# Altium PCB ElvipPCB.PcbDoc (part 3 of 3)
Units mm, origin at the board's own origin, x right, y up, seen from the top; angles counter-clockwise.
Board outline 279.53 x 216.03 mm, 2 copper layers (Top Layer, Bottom Layer), stack 2.071 mm thick; 97 components, 303 nets, 932 pads, 720 vias.
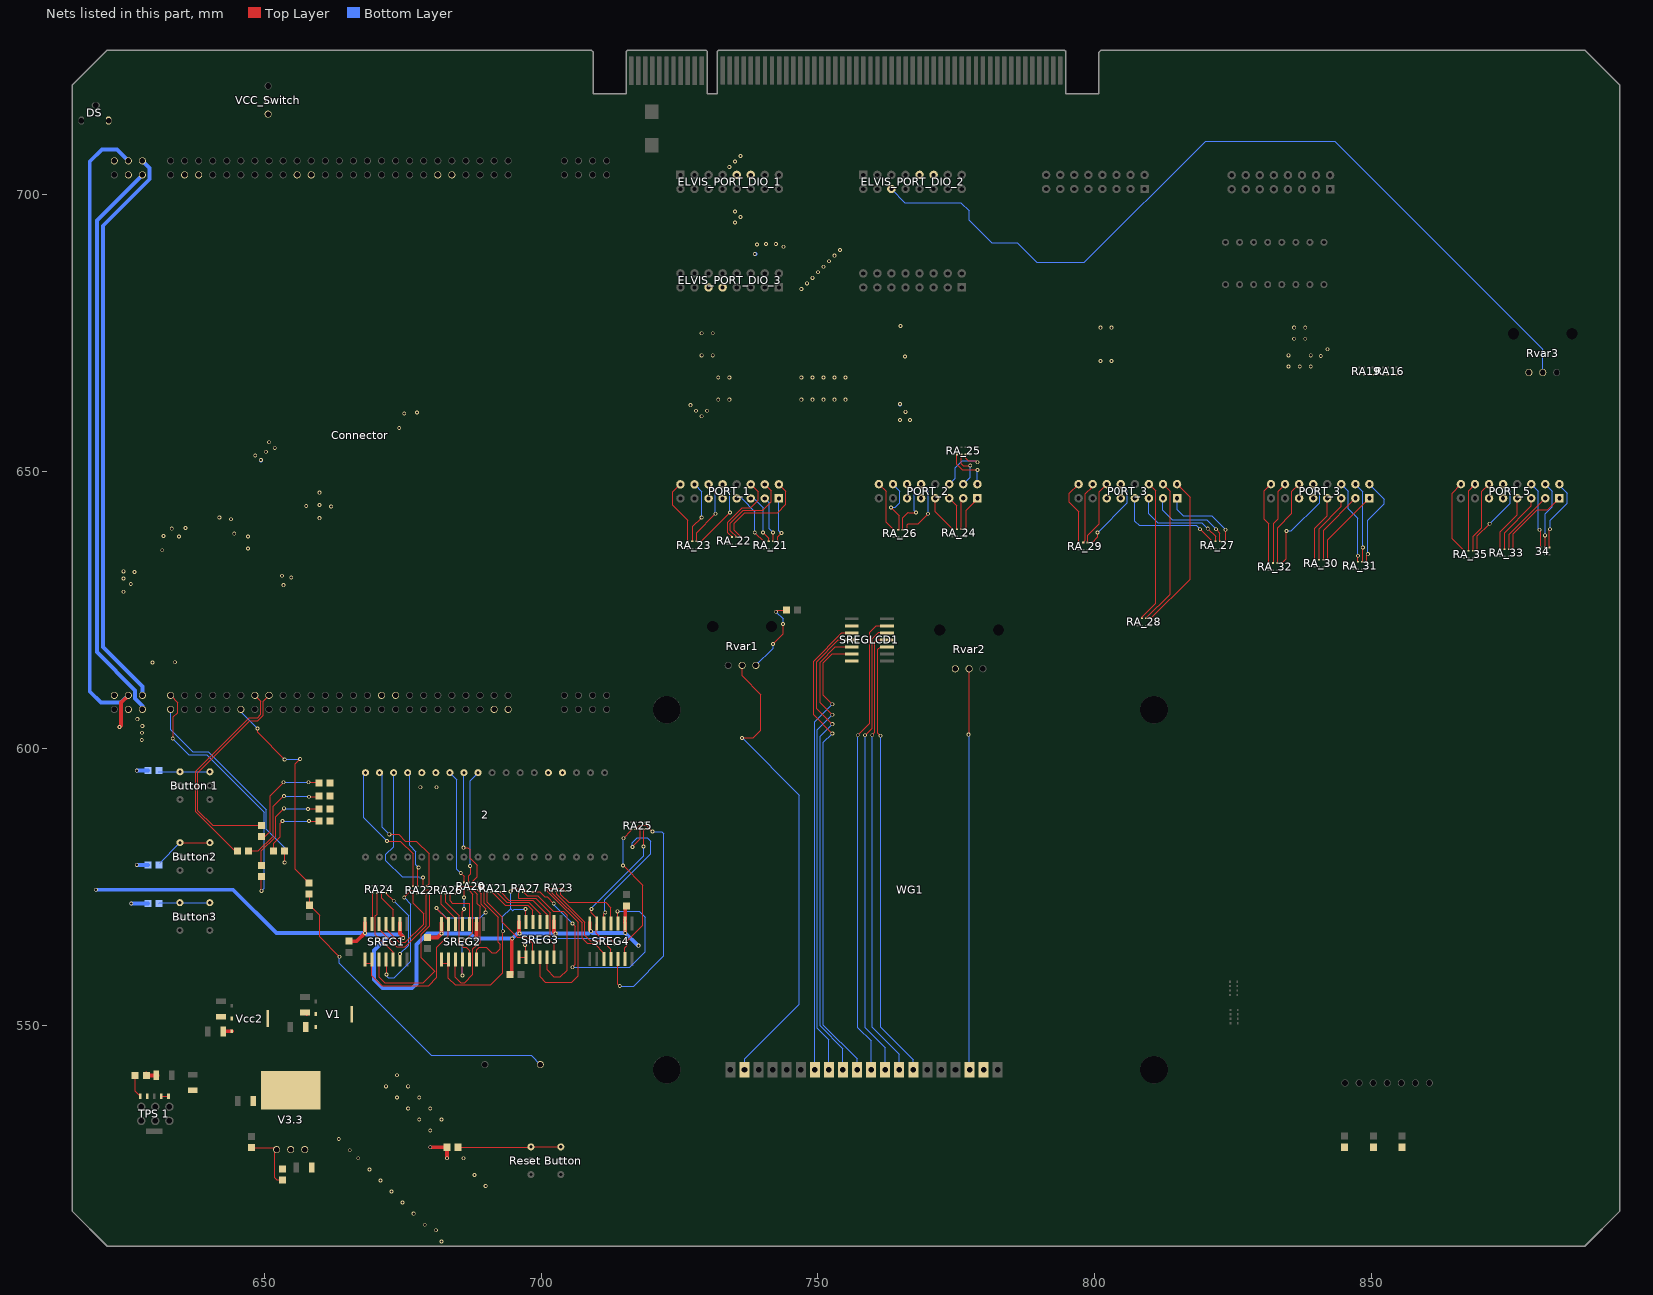
[diagram p3: the nets of this part, all layers, seen from the top]

## Via types
v1: diameter 0.7, hole 0.4, Top Layer to Bottom Layer, 720 vias

## Nets (pads, with @x,y where several pads share a name; then routed paths per layer and width w, separated by ;. In a path a pad name is that pad's centre, name@x,y a point inside that pad or via, vN(x,y) a via of type N, cw(c..) or ccw(c..) an arc to the next point about the centre after c; other vN are vias at no path point) (continued)
Net2_28: 2.28 RA20.1 | length 20.5
  Top Layer w0.2: RA20.1@686.9,575.8 686.9,577 687.3,577.4 687.3,578.7 v1(687.2,578.8)
  Bottom Layer w0.2: v1@687.2,578.9 687.2,594.22 2.28@688.62,595.64
Net2_29: 2.29 RA20.2 | length 21.7
  Top Layer w0.2: v1(686,582.1) 686.8,582.1 687.2,581.7 687.2,580.2 688.5,578.9 688.5,576.8 687.7,576 RA20.2@687.7,575.8
  Bottom Layer w0.2: v1(686,582.1) 686,595.56 2.29@686.08,595.64
Net2_30: 2.30 RA20.0 | length 20.9
  Top Layer w0.2: v1(685.5,577.5) 686.1,576.9 RA20.0@686.1,575.8
  Bottom Layer w0.2: 2.30@683.54,595.64 684.8,594.38 684.8,578.2 v1(685.5,577.5)
Net2_33: 2.33 RA22.1 | length 21.4
  Top Layer w0.2: RA22.1@677.7,575.1 677.7,578.3 v1(677.9,578.5)
  Bottom Layer w0.2: 2.33@675.92,595.64 676.3,595.26 676.3,582.5 677.4,581.4 677.4,579 v1(677.9,578.5)
Net2_34: 2.34 RA22.2 | length 26
  Top Layer w0.2: RA22.2@678.5,575.1 678.7,575.3 v1(678.7,576.7)
  Bottom Layer w0.2: 2.34@673.38,595.64 673.38,582.28 672,580.9 672,579.7 674.9,576.8 678,576.8 ; 678.1,576.7 v1(678.7,576.7)
Net2_35: 2.35 RA22.3 | length 26.6
  Top Layer w0.2: v1(672.6,584.5) 674.3,584.5 675.5,583.3 677.5,583.3 679.8,581 679.8,575.6 RA22.3@679.3,575.1
  Bottom Layer w0.2: 2.35@670.84,595.64 671.3,595.18 671.3,585.8 v1(672.6,584.5)
Net2_36: 2.36 RA22.0 | length 25.8
  Top Layer w0.2: v1(672.2,583.3) 674.6,583.3 676.9,581 RA22.0@676.9,575.1
  Bottom Layer w0.2: 2.36@668.3,595.64 668,595.34 668,587.5 v1(672.2,583.3)
NET_VD1: Connector.74 VD1.1 | length 37.7
  Top Layer w0.2: VD1.1@645.2,581.6 644.6,581.6 637.6,588.6 637.6,595.9 647.3,605.6 648.8,605.6 649.4,606.2 649.4,608.535 Connector.74@648.335,609.6
NET_VD2: Connector.75 VD2.1 | length 39.6
  Top Layer w0.2: VD2.1@649.5,586.1 640.7,586.1 638,588.8 638,595.6 647.4,605 648.8,605 649.8,606 649.8,608.525 Connector.75@650.875,609.6
NET_VD3: Connector.125 VD3.1 | length 39.9
  Top Layer w0.2: v1(653.7,579.405) VD3.1@653.7,581.5
  Bottom Layer w0.2: Connector.125@633.095,607.06 633.095,603.405 637.1,599.4 639.9,599.4 650.4,588.9 650.4,585.4 653.7,582.1 v1(653.7,579.405)
NET_VD4: Connector.68 VD4.1 | length 47.7
  Top Layer w0.2: Connector.68@633.095,609.6 634.4,608.295 634.4,606.5 633.6,605.7 633.6,601.9 v1(633.5,601.8) ; v1(649.5,574.3) VD4.1@649.5,576.9
  Bottom Layer w0.2: v1(633.5,601.8) 636.4,598.9 639.6,598.9 650,588.5 650,574.8 v1(649.5,574.3)
NetButton2_3: Button2.3 Button2.6 R10.2 | length 10.6
  Top Layer w0.2: Button2.3@634.8,583 Button2.6@640.2,583
  Bottom Layer w0.2: R10.2@631.1,579.3 Button2.3@634.8,583
NetButton3_3: Button3.3 Button3.6 R11.2 | length 9.2
  Bottom Layer w0.2: R11.2@631,572 631.16,572.16 Button3.3@634.78,572.16 Button3.6@640.18,572.16
"NetButton 1_3": "Button 1.3" "Button 1.6" R9.2 | length 9.3
  Bottom Layer w0.2: R9.2@630.9,595.8 634.8,595.8 640.2,595.8
NetC1_2: C1.2 R6.2 Sound1.1 | length 58.6
  Top Layer w0.2: R6.2@658.1,573.7 658.2,573.6 C1.2@658.2,571.7 660,569.9 660,566 v1(663.6,562.4)
  Bottom Layer w0.2: v1(663.6,562.4) 663.6,561.2 680.2,544.6 698.2,544.6 Sound1.1@699.87,542.93
NetR2_1: R2.1 Rvar1.2 | length 13.9
  Top Layer w0.2: v1(741.9,618.9) 743.7,620.7 v1(743.7,622.5) ; v1(742.4,624.7) 742.7,625 R2.1@743.9,625
  Bottom Layer w0.2: Rvar1.2@738.8,615 741.9,618.1 v1(741.9,618.9) ; v1(742.4,624.7) 743.7,623.4 v1(743.7,622.5)
NetR7_1: R7.1 VD1.2 | length 20.1
  Top Layer w0.2: VD1.2@647.2,581.5 648.9,581.5 651.6,584.2 651.6,589.6 653.5,591.5 v1(653.6,591.4) ; v1(658.1,591.3) 659.8,591.3 R7.1@659.9,591.4
  Bottom Layer w0.2: v1(653.6,591.4) 658,591.4 v1(658.1,591.3)
NetR8_1: R8.1 VD2.2 | length 18.2
  Top Layer w0.2: VD2.2@649.5,584.1 650.1,584.1 651.1,585.1 651.1,591.5 v1(653.5,593.9) ; v1(658,593.9) 659.8,593.9 R8.1@659.9,593.8
  Bottom Layer w0.2: v1(653.5,593.9) v1(658,593.9)
NetR12_2: "Reset Button.3" "Reset Button.6" R12.2 | length 18.6
  Top Layer w0.2: R12.2@685,528 698.1,528 698.17,528.07 703.57,528.07
NetR13_2: "TPS 1.4" R13.2 | length 4.1
  Top Layer w0.2: R13.2@626.71,540.96 626.71,538.11 627.62,537.2
NetR14_1: R14.1 VD4.2 | length 18.4
  Top Layer w0.2: VD4.2@649.5,578.9 649.5,581.5 652.1,584.1 652.1,587.7 v1(653.6,589.2) ; v1(657.9,589.1) 657.916,589.116 R14.1@659.912,589.116
  Bottom Layer w0.2: v1(653.6,589.2) 653.7,589.1 v1(657.9,589.1)
NetR15_1: R15.1 VD3.2 | length 12.7
  Top Layer w0.2: VD3.2@651.7,581.5 651.7,582.9 652.9,584.1 652.9,586.5 v1(653.3,586.9) ; v1(658.1,586.9) R15.1@659.9,586.9
  Bottom Layer w0.2: v1(653.3,586.9) v1(658.1,586.9)
NetR50_1: R50.1 R51.2 V3.3.0 | length 11.5
  Top Layer w0.2: R51.2@647.74,527.95 651.88,527.95 V3.3.0@652.25,527.58 651.88,527.21 651.88,522.48 652.27,522.09 R50.1@653.34,522.09
NetRA20_4: RA20.4 SREG1.1 SREG1.2 SREG2.13 | length 45.6
  Top Layer w0.2: SREG1.1@668.2,561.2 669.47,561.2 669.47,558.93 671.2,557.2 679.7,557.2 681.2,558.7 681.2,564.1 683.27,566.17 SREG2.13@683.27,568.3 683.27,569.03 v1(681.1,571.2) ; RA20.4@688.5,574.5 689.2,573.8 689.2,571.9 690,571.1 v1(690,570.4)
  Bottom Layer w0.2: v1(681.1,571.2) 682.9,569.4 689,569.4 v1(690,570.4)
NetRA20_5: RA20.5 SREG2.3 | length 23.2
  Top Layer w0.2: SREG2.3@684.54,561.2 684.54,558.66 685.5,557.7 686.2,557.7 687.7,559.2 687.7,563.8 688.4,564.5 688.6,564.5 689,564.9 689,571.5 688.5,572 688.5,573.7 RA20.5@687.7,574.5
NetRA20_6: RA20.6 SREG2.4 | length 20.6
  Top Layer w0.2: v1(685.8,559) 685.8,562.94 SREG2.4@685.81,562.95 ; v1(686.3,565.3) 687.7,566.7 687.7,573.7 RA20.6@686.9,574.5
  Bottom Layer w0.2: v1(685.8,559) 685.8,564.8 v1(686.3,565.3)
NetRA20_7: RA20.7 SREG2.11 | length 6.6
  Top Layer w0.2: SREG2.11@685.81,568.5 685.81,570.51 686.1,570.8 v1(686.1,571) ; v1(686.1,573.1) RA20.7@686.1,574.5
  Bottom Layer w0.2: 685.9,570.6 686.1,570.8 v1(686.1,571) v1(686.1,573.1)
NetRA21_4: RA21.4 SREG3.10 | length 11.2
  Top Layer w0.2: RA21.4@692.7,574.1 694.2,572.6 698.5,572.6 701.08,570.02 SREG3.10@701.08,568.9
NetRA21_5: RA21.5 SREG3.11 | length 10.8
  Top Layer w0.2: RA21.5@691.9,574.1 693.8,572.2 697.8,572.2 699.81,570.19 SREG3.11@699.81,568.9
NetRA21_6: RA21.6 SREG3.12 | length 10.7
  Top Layer w0.2: RA21.6@691.1,574.1 693.5,571.7 697.6,571.7 698.54,570.76 SREG3.12@698.54,568.9
NetRA21_7: RA21.7 SREG3.3 | length 17
  Top Layer w0.2: RA21.7@690.3,574.1 690.3,572.2 693,569.5 693,568.6 695.7,565.9 697.5,565.9 698.54,564.86 SREG3.3@698.54,562.3 SREG3.3@698.54,561.6
NetRA22_4: RA22.4 SREG1.12 | length 18.4
  Top Layer w0.2: SREG1.12@670.74,568.5 SREG1.12@670.74,568.3 670.74,567.36 673.9,564.2 675.5,564.2 679.3,568 RA22.4@679.3,573.8
NetRA22_5: RA22.5 SREG1.3 | length 31.7
  Top Layer w0.2: SREG1.3@670.74,561.2 670.8,561.14 670.8,558.7 671.8,557.7 678.7,557.7 680.8,559.8 678.4,562.2 678.4,566.5 679.9,568 679.9,574.3 679.7,574.5 679.2,574.5 RA22.5@678.5,573.8
NetRA22_6: RA22.6 SREG1.4 | length 23.3
  Top Layer w0.2: SREG1.4@672.01,561.2 672.1,561.11 v1(672.1,559.2) ; v1(675.3,573.1) 676.6,574.4 677.1,574.4 RA22.6@677.7,573.8
  Bottom Layer w0.2: v1(672.1,559.2) 672.1,558.9 672.4,558.6 673.5,558.6 676.5,561.6 676.5,571.9 v1(675.3,573.1)
NetRA22_7: RA22.7 SREG1.11 | length 16.5
  Top Layer w0.2: SREG1.11@672.01,568.5 SREG1.11@672.01,568.3 672.01,567.39 674.4,565 675.5,565 678.8,568.3 678.8,570.2 676.9,572.1 RA22.7@676.9,573.8
NetRA23_4: RA23.4 SREG3.4 | length 32.1
  Top Layer w0.2: SREG3.4@699.81,561.6 699.81,558.79 700.8,557.8 705.5,557.8 706.7,559 706.7,568.6 701.1,574.2 701.1,574.5 701.4,574.8 703.8,574.8 RA23.4@704.4,574.2
NetRA23_5: RA23.5 SREG4.11 | length 13.3
  Top Layer w0.2: RA23.5@703.6,574.2 703.6,573.6 705,572.2 711.7,572.2 712.61,571.29 SREG4.11@712.61,568.6
NetRA23_6: RA23.6 SREG4.4 | length 18.3
  Top Layer w0.2: RA23.6@702.8,574.2 702.8,573.7 707.9,568.6 707.9,566.3 708.9,565.3 711.1,565.3 712.61,563.79 SREG4.4@712.61,562 SREG4.4@712.61,561.3
NetRA23_7: RA23.7 SREG4.3 | length 17.5
  Top Layer w0.2: RA23.7@702,574.2 702,573.9 707.4,568.5 707.4,565.7 708.3,564.8 709.59,564.8 711.34,563.05 SREG4.3@711.34,562 SREG4.3@711.34,561.3
NetRA24_0: RA24.0 SREG1.6 | length 15.1
  Top Layer w0.2: RA24.0@672,573.9 v1(673.4,572.5) ; SREG1.6@674.55,561.25 SREG1.6@674.55,561.9 SREG1.6@674.55,562.95
  Bottom Layer w0.2: v1(673.4,572.5) 676.1,569.8 676.1,564.5 v1(674.5,562.9)
NetRA24_1: RA24.1 SREG1.10 | length 6.3
  Top Layer w0.2: RA24.1@671.2,573.9 671.2,573 673.28,570.92 SREG1.10@673.28,568.5
NetRA24_2: RA24.2 SREG1.5 | length 14.1
  Top Layer w0.2: RA24.2@670.4,573.9 670.4,570.1 670.1,569.8 670.1,566.4 673.28,563.22 SREG1.5@673.28,561.9 SREG1.5@673.28,561.2
NetRA24_3: RA24.3 SREG1.13 | length 5.5
  Top Layer w0.2: SREG1.13@669.47,568.5 669.6,568.63 RA24.3@669.6,573.9
NetRA25_0: RA25.0 SREG3.1 SREG3.2 SREG4.13 | length 47.5
  Top Layer w0.2: SREG3.1@696,562.3 SREG3.2@697.27,562.3 697.27,564.33 v1(697.1,564.5) ; v1(709.1,571) 709.1,570.3 710.07,569.33 SREG4.13@710.07,568.6 ; SREG4.13@710.07,568.4 710,568.33 710,566.6 710.6,566 712.1,566 v1(713.3,564.8) ; v1(718.5,582.3) 718.5,585.2 RA25.0@718.7,585.4
  Bottom Layer w0.2: v1(697.1,564.5) 698.3,565.7 712.4,565.7 v1(713.3,564.8) ; v1@709.1,571.2 718.5,580.6 v1(718.5,582.3)
NetRA25_1: RA25.1 SREG4.12 | length 26.8
  Top Layer w0.2: SREG4.12@711.34,568.6 711.34,570.14 v1(711.6,570.4) ; v1(716.5,582.2) 716.5,582.3 717.9,583.7 RA25.1@717.9,585.4
  Bottom Layer w0.2: v1(711.6,570.4) 711.5,570.5 711.5,572.7 719.8,581 719.8,583.3 719.2,583.9 717.4,583.9 716.5,583 v1(716.5,582.2)
NetRA25_2: RA25.2 SREG4.5 | length 42.6
  Top Layer w0.2: SREG4.5@713.88,561.3 713.88,557.42 v1(714.2,557.1) ; RA25.2@717.1,585.4 717.8,586.1 719,586.1 v1(720.1,585)
  Bottom Layer w0.2: v1(714.2,557.1) 716.7,557.1 722.2,562.6 722.2,584.6 721.8,585 v1(720.1,585)
NetRA25_3: RA25.3 SREG4.6 | length 27.6
  Top Layer w0.2: v1(714.8,578.9) 718.4,575.3 718.4,568.1 715.6,565.3 715.6,564.45 715.15,564 SREG4.6@715.15,562 SREG4.6@715.15,561.3 ; v1(714.9,583.8) 716.3,585.2 RA25.3@716.3,585.4
  Bottom Layer w0.2: v1(714.8,578.9) 714.8,583.7 v1(714.9,583.8)
NetRA26_0: RA26.0 SREG2.6 | length 25.7
  Top Layer w0.2: RA26.0@684.4,573.8 685.7,575.1 689.3,575.1 689.7,574.7 689.7,572.1 692.3,569.5 692.3,565 692.6,564.7 692.6,563.8 691.9,563.1 691.1,563.1 690.1,564.1 688.8,564.1 688.35,563.65 SREG2.6@688.35,561.9 SREG2.6@688.35,561.2
NetRA26_1: RA26.1 SREG2.10 | length 8.5
  Top Layer w0.2: RA26.1@683.6,573.8 683.6,572.5 684,572.1 687.08,572.1 SREG2.10@687.08,568.5
NetRA26_2: RA26.2 SREG2.5 | length 14.7
  Top Layer w0.2: RA26.2@682.8,573.8 682.8,572.2 685.2,569.8 685.2,564.83 685.93,564.1 686.5,564.1 687.08,563.52 SREG2.5@687.08,561.9 SREG2.5@687.08,561.2
NetRA26_3: RA26.3 SREG2.12 | length 6.4
  Top Layer w0.2: RA26.3@682,573.8 682,571.9 684.54,569.36 SREG2.12@684.54,568.5
NetRA27_0: RA27.0 SREG4.10 | length 46
  Top Layer w0.2: RA27.0@698.4,574.1 699.8,574.1 700.7,573.2 701.1,573.2 v1(702.3,572) ; v1(705.7,560.5) 706.2,561 706.2,567.9 v1(705.7,568.4) ; v1(713.8,570.6) 713.88,570.52 SREG4.10@713.88,568.6
  Bottom Layer w0.2: v1(702.3,572) 702.3,571.8 v1(705.7,568.4) ; v1(705.7,560.5) 716,560.5 718.8,563.3 718.8,569.5 717.7,570.6 v1(713.8,570.6)
NetRA27_1: RA27.1 SREG2.1 SREG2.2 SREG3.13 | length 40.1
  Top Layer w0.2: SREG2.1@682,561.2 683.27,561.2 683.27,558.53 684.5,557.3 690.9,557.3 693.1,559.5 v1(693.1,567) ; v1(694.5,574.2) 695,574.7 697,574.7 RA27.1@697.6,574.1 ; 697.2,570.6 v1(697.2,571) 697.27,570.93 SREG3.13@697.27,568.9
  Bottom Layer w0.2: v1(693.1,567) 693.1,569.7 694.5,571.1 ; v1(694.5,574.2) 694.5,571.1 ; v1@697.1,570.7 697.2,570.6 v1(697.2,571) 695.2,571 694.9,570.7 694.5,571.1
NetRA27_2: RA27.2 SREG3.5 | length 25.7
  Top Layer w0.2: RA27.2@696.8,574.1 697.5,573.4 699.4,573.4 702.2,570.6 704,570.6 704.7,569.9 704.7,560 703.5,558.8 702.3,558.8 701.08,560.02 SREG3.5@701.08,561.6
NetRA27_3: RA27.3 SREG3.6 | length 16.9
  Top Layer w0.2: RA27.3@696,574.1 696,573 699,573 701.7,570.3 701.7,565.3 702.35,564.65 SREG3.6@702.35,562.3 SREG3.6@702.35,561.6
NetRvar1_1: Rvar1.1 WG1.18 | length 85.3
  Top Layer w0.2: v1(736.3,601.9) 738.3,601.9 739.7,603.3 739.7,609.7 736.3,613.1 Rvar1.1@736.3,615
  Bottom Layer w0.2: v1(736.3,601.9) 746.6,591.6 746.6,553.8 736.74,543.94 WG1.18@736.74,542
NetRvar2_1: Rvar2.1 WG1.2 | length 72.5
  Top Layer w0.2: v1(777.2,602.5) 777.3,602.6 Rvar2.1@777.3,614.4
  Bottom Layer w0.2: v1(777.2,602.5) 777.3,602.4 777.3,542.08 WG1.2@777.38,542
NetSREGLCD1_3: SREGLCD1.3 WG1.6 | length 81.2
  Top Layer w0.2: v1(761.3,602.3) 760.8,602.8 760.8,617.9 761.3,618.4 763.14,618.4 SREGLCD1.3@763.2,618.34
  Bottom Layer w0.2: v1(761.3,602.3) 761.3,549.7 767.22,543.78 WG1.6@767.22,542
NetSREGLCD1_4: SREGLCD1.4 WG1.7 | length 82.6
  Top Layer w0.2: v1(759.8,602.4) 760.3,602.9 760.3,619.3 760.61,619.61 SREGLCD1.4@762.5,619.61 SREGLCD1.4@763.2,619.61
  Bottom Layer w0.2: v1(759.8,602.4) 759.8,549.7 764.68,544.82 WG1.7@764.68,542
NetSREGLCD1_5: SREGLCD1.5 WG1.8 | length 83.8
  Top Layer w0.2: v1(758.5,602.4) 759.8,603.7 759.8,619.8 761,621 763.08,621 SREGLCD1.5@763.2,620.88
  Bottom Layer w0.2: v1(758.5,602.4) 758.5,549.6 762.14,545.96 WG1.8@762.14,542
NetSREGLCD1_6: SREGLCD1.6 WG1.9 | length 85.2
  Top Layer w0.2: v1(757.2,602.4) 759.4,604.6 759.4,621 760.55,622.15 SREGLCD1.6@762.5,622.15 SREGLCD1.6@763.2,622.15
  Bottom Layer w0.2: v1(757.2,602.4) 757.2,549.6 759.6,547.2 WG1.9@759.6,542
NetSREGLCD1_10: SREGLCD1.10 WG1.10 | length 86.7
  Top Layer w0.2: v1(752.6,602.7) 749.2,606.1 749.2,615.8 754.28,620.88 SREGLCD1.10@755.4,620.88
  Bottom Layer w0.2: v1(752.6,602.7) 751,601.1 751,550 757.06,543.94 WG1.10@757.06,542
NetSREGLCD1_11: SREGLCD1.11 WG1.11 | length 84.7
  Top Layer w0.2: v1(752.6,604.4) 749.8,607.2 749.8,615.7 753.71,619.61 SREGLCD1.11@755.4,619.61
  Bottom Layer w0.2: v1(752.6,604.4) 750.4,602.2 750.4,549.9 754.52,545.78 WG1.11@754.52,542
NetSREGLCD1_12: SREGLCD1.12 WG1.12 | length 82.6
  Top Layer w0.2: v1(752.6,606.1) 750.4,608.3 750.4,615.6 753.14,618.34 SREGLCD1.12@755.4,618.34
  Bottom Layer w0.2: WG1.12@751.98,542 751.98,547.42 749.9,549.5 749.9,603.4 v1(752.6,606.1)
NetSREGLCD1_13: SREGLCD1.13 WG1.13 | length 80.5
  Top Layer w0.2: v1(752.6,608) 751,609.6 751,615.5 752.57,617.07 SREGLCD1.13@755.4,617.07
  Bottom Layer w0.2: WG1.13@749.44,542 749.44,604.84 v1(752.6,608)
P_GIO_1_0: PORT_1.0 RA_21.3 | length 8.2
  Top Layer w0.2: RA_21.3@742.7,637.4 742.7,638.2 v1(743.4,638.9)
  Bottom Layer w0.2: PORT_1.0@742.95,645.16 742.95,639.35 v1(743.4,638.9)
P_GIO_1_1: PORT_1.1 RA_21.2 | length 8.4
  Top Layer w0.2: RA_21.2@741.9,637.4 v1(741.9,639)
  Bottom Layer w0.2: PORT_1.1@740.41,645.16 741.2,644.37 741.2,639.7 v1(741.9,639)
P_GIO_1_2: PORT_1.2 RA_21.1 | length 9.4
  Top Layer w0.2: v1(740.1,639) 741.1,638 RA_21.1@741.1,637.4
  Bottom Layer w0.2: PORT_1.2@737.87,645.16 738.44,645.16 740.1,643.5 v1(740.1,639)
P_GIO_1_3: PORT_1.3 RA_21.0 | length 10.4
  Top Layer w0.2: v1(738.6,639) 740.2,637.4 RA_21.0@740.3,637.4
  Bottom Layer w0.2: PORT_1.3@735.33,645.16 736.24,645.16 738.6,642.8 v1(738.6,639)
P_GIO_1_8: PORT_1.8 RA_23.4 | length 12
  Top Layer w0.2: PORT_1.8@725.17,647.7 723.8,646.33 723.8,643.9 726.5,641.2 RA_23.4@726.5,637.4
P_GIO_1_9: PORT_1.9 RA_23.5 | length 11.7
  Top Layer w0.2: RA_23.5@727.3,637.4 727.4,637.5 727.4,640.1 v1(729,641.7) ; PORT_1.9@727.71,647.49 PORT_1.9@727.71,647.7
  Bottom Layer w0.2: PORT_1.9@727.71,647.7 729,646.41 v1(729,641.7)
P_GIO_1_10: PORT_1.10 RA_23.6 | length 12.2
  Top Layer w0.2: RA_23.6@728.1,637.4 728.1,639 v1(731.5,642.4)
  Bottom Layer w0.2: PORT_1.10@730.25,647.7 731.5,646.45 v1(731.5,642.4)
P_GIO_1_11: PORT_1.11 RA_23.7 | length 13
  Top Layer w0.2: RA_23.7@728.9,637.4 v1(734.1,642.6)
  Bottom Layer w0.2: PORT_1.11@732.79,647.7 734.1,646.39 v1(734.1,642.6)
P_GIO_1_13_E_VCC: PORT_1.13 RA_22.1 | length 13.6
  Top Layer w0.2: RA_22.1@734.5,638.2 733.7,639 733.7,640.9 736.3,643.5 737.9,643.5 739.2,644.8 739.2,646.37 PORT_1.13@737.87,647.7
P_GIO_1_14_E_SYNC: PORT_1.14 RA_22.2 | length 15.6
  Top Layer w0.2: RA_22.2@735.3,638.2 734.2,639.3 734.2,640.7 736.5,643 740,643 741.6,644.6 741.6,646.51 PORT_1.14@740.41,647.7
P_GIO_1_15_AO1: PORT_1.15 RA_22.3 | length 17.8
  Top Layer w0.2: RA_22.3@736.1,638.2 734.9,639.4 734.9,640.7 736.8,642.6 742.7,642.6 744.2,644.1 744.2,646.45 PORT_1.15@742.95,647.7
P_GIO_2_0: PORT_2.0 RA_24.7 | length 6.5
  Top Layer w0.2: RA_24.7@776.7,639.6 776.8,639.7 776.8,643 778.79,644.99 PORT_2.0@778.79,645.2
P_GIO_2_1: PORT_2.1 RA_24.6 | length 5.7
  Top Layer w0.2: RA_24.6@775.9,639.6 775.9,644.85 PORT_2.1@776.25,645.2
P_GIO_2_2: PORT_2.2 RA_24.5 | length 6.2
  Top Layer w0.2: PORT_2.2@773.71,645.2 775.1,643.81 RA_24.5@775.1,639.6
P_GIO_2_3: PORT_2.3 RA_24.4 | length 6.9
  Top Layer w0.2: PORT_2.3@771.17,645.2 771.17,642.73 RA_24.4@774.3,639.6
P_GIO_2_8: PORT_2.8 RA_26.4 | length 9.4
  Top Layer w0.2: PORT_2.8@761.01,647.74 762.3,646.45 762.3,640.9 RA_26.4@763.7,639.5
P_GIO_2_9: PORT_2.9 RA_26.5 | length 10.5
  Top Layer w0.2: v1(763.2,643.5) 764.7,642 764.7,639.7 RA_26.5@764.5,639.5
  Bottom Layer w0.2: v1(763.2,643.5) 763.3,643.6 764,643.6 764.8,644.4 764.8,646.49 PORT_2.9@763.55,647.74
P_GIO_2_10: PORT_2.10 RA_26.6 | length 10.9
  Top Layer w0.2: RA_26.6@765.3,639.5 765.3,641.7 766.3,642.7 766.4,642.6 v1(767.7,642.6)
  Bottom Layer w0.2: PORT_2.10@766.09,647.74 767.4,646.43 767.4,642.9 v1(767.7,642.6)
P_GIO_2_11: PORT_2.11 RA_26.7 | length 11.4
  Top Layer w0.2: RA_26.7@766.1,639.5 766.1,640.4 766.3,640.6 768.1,640.6 v1(769.9,642.4)
  Bottom Layer w0.2: PORT_2.11@768.63,647.74 769.9,646.47 v1(769.9,642.4)
P_GIO_2_13_E_VCC: PORT_2.13 RA_25.1 | length 11.2
  Top Layer w0.2: RA_25.1@776.7,653.1 776.7,652.4 777.1,652 778.5,652 v1(778.8,651.7)
  Bottom Layer w0.2: PORT_2.13@773.71,647.74 774.8,648.83 774.8,650.7 776.1,652 778.5,652 v1(778.8,651.7)
P_GIO_2_14_E_SYNC: PORT_2.14 RA_25.2 | length 7.3
  Top Layer w0.2: RA_25.2@775.9,653.1 775.9,651.4 776.2,651.1 v1(777.5,651.1)
  Bottom Layer w0.2: PORT_2.14@776.25,647.74 777.5,648.99 v1(777.5,651.1)
P_GIO_2_15_AO2: PORT_2.15 RA_25.3 | length 8.5
  Top Layer w0.2: RA_25.3@775.1,653.1 775.1,651.3 776.1,650.3 v1(778.8,650.3)
  Bottom Layer w0.2: PORT_2.15@778.79,647.74 778.8,647.75 v1(778.8,650.3)
P_GIO_3_0: P0RT_3.0 RA_27.3 | length 14.5
  Top Layer w0.2: RA_27.3@823.4,637.4 823.6,637.6 v1(823.6,639.5)
  Bottom Layer w0.2: P0RT_3.0@814.85,645.2 814.85,643.15 816,642 821.1,642 v1(823.6,639.5)
P_GIO_3_1: P0RT_3.1 RA_27.2 | length 15.7
  Top Layer w0.2: v1(821.9,639.6) 822.6,638.9 RA_27.2@822.6,637.4
  Bottom Layer w0.2: P0RT_3.1@812.31,645.2 812.31,642.99 814,641.3 820.2,641.3 v1(821.9,639.6)
P_GIO_3_2: P0RT_3.2 RA_27.1 | length 17.4
  Top Layer w0.2: v1(820.4,639.7) 821.8,638.3 RA_27.1@821.8,637.4
  Bottom Layer w0.2: P0RT_3.2@809.77,645.2 809.77,642.43 811.4,640.8 819.3,640.8 v1(820.4,639.7)
P_GIO_3_3: P0RT_3.3 RA_27.0 | length 19.5
  Top Layer w0.2: v1(819,639.6) 821,637.6 RA_27.0@821,637.4
  Bottom Layer w0.2: P0RT_3.3@807.23,645.2 807.23,641.07 808,640.3 818.3,640.3 v1(819,639.6)
P_GIO_3_8: P0RT_3.8 RA_29.4 | length 11.9
  Top Layer w0.2: P0RT_3.8@797.07,647.74 795.4,646.07 795.4,644.5 797.1,642.8 RA_29.4@797.1,637.2
P_GIO_3_9: P0RT_3.9 RA_29.5 | length 11.2
  Top Layer w0.2: RA_29.5@797.9,637.2 798.3,637.6 798.3,646 799.61,647.31 P0RT_3.9@799.61,647.74
P_GIO_3_10: P0RT_3.10 RA_29.6 | length 12
  Top Layer w0.2: RA_29.6@798.7,637.2 798.7,638.5 800.8,640.6 800.8,646.39 P0RT_3.10@802.15,647.74
P_GIO_3_11: P0RT_3.11 RA_29.7 | length 13.7
  Top Layer w0.2: RA_29.7@799.5,637.2 800.5,638.2 v1(800.5,639)
  Bottom Layer w0.2: v1(800.5,639) 805.9,644.4 805.9,646.53 P0RT_3.11@804.69,647.74
P_GIO_3_13_E_VCC: P0RT_3.13 RA_28.5 | length 25.8
  Top Layer w0.2: RA_28.5@808.5,623.5 808.5,623.7 811,626.2 811,646.51 P0RT_3.13@809.77,647.74
P_GIO_3_14_E_SYNC: P0RT_3.14 RA_28.6 | length 26.6
  Top Layer w0.2: RA_28.6@809.3,623.5 809.3,623.6 813.6,627.9 813.6,646.45 P0RT_3.14@812.31,647.74
P_GIO_3_15_AO3: P0RT_3.15 RA_28.7 | length 28.2
  Top Layer w0.2: RA_28.7@810.1,623.5 817.2,630.6 817.2,645.39 P0RT_3.15@814.85,647.74
P_GIO_4_0: PORT_3.0 RA_30.3 | length 14.2
  Top Layer w0.2: RA_30.3@842.1,634.1 842.1,637.71 PORT_3.0@849.59,645.2
P_GIO_4_1: PORT_3.1 RA_30.2 | length 13.5
  Top Layer w0.2: RA_30.2@841.3,634.1 841.3,639.45 PORT_3.1@847.05,645.2
P_GIO_4_2: PORT_3.2 RA_30.1 | length 12.8
  Top Layer w0.2: RA_30.1@840.5,634.1 840.5,639.7 844.51,643.71 PORT_3.2@844.51,645.2
P_GIO_4_3: PORT_3.3 RA_30.0 | length 12
  Top Layer w0.2: RA_30.0@839.7,634.1 839.7,639.8 841.97,642.07 PORT_3.3@841.97,645.2
P_GIO_4_8: PORT_3.8 RA_32.4 | length 15.1
  Top Layer w0.2: RA_32.4@831.4,633.5 831.4,640.6 830.6,641.4 830.6,646.53 PORT_3.8@831.81,647.74
P_GIO_4_9: PORT_3.9 RA_32.5 | length 15.1
  Top Layer w0.2: RA_32.5@832.2,633.5 832.3,633.6 832.3,640.7 833.1,641.5 833.1,646.49 PORT_3.9@834.35,647.74
P_GIO_4_10: PORT_3.10 RA_32.6 | length 15.9
  Top Layer w0.2: RA_32.6@833,633.5 833,639.9 835.6,642.5 835.6,646.45 PORT_3.10@836.89,647.74
P_GIO_4_11: PORT_3.11 RA_32.7 | length 18.1
  Top Layer w0.2: RA_32.7@833.8,633.5 834.6,634.3 v1(834.6,639.3)
  Bottom Layer w0.2: v1(834.6,639.3) 835.5,639.3 840.6,644.4 840.6,645.86 839.43,647.03 PORT_3.11@839.43,647.74
P_GIO_4_13_E_VCC: PORT_3.13 RA_31.1 | length 15.3
  Top Layer w0.2: RA_31.1@847.5,633.7 v1(847.5,634.8)
  Bottom Layer w0.2: PORT_3.13@844.51,647.74 845.8,646.45 845.8,643.3 847.5,641.6 v1(847.5,634.8)
P_GIO_4_14_E_SYNC: PORT_3.14 RA_31.2 | length 14.6
  Top Layer w0.2: RA_31.2@848.3,633.7 848.4,633.8 v1(848.4,636.3)
  Bottom Layer w0.2: PORT_3.14@847.05,647.74 848.4,646.39 v1(848.4,636.3)
P_GIO_4_15_AO4: PORT_3.15 RA_31.3 | length 16.5
  Top Layer w0.2: RA_31.3@849.1,633.7 849.1,634.9 v1(849.3,635.1)
  Bottom Layer w0.2: v1(849.3,635.1) 849.3,641.2 852.3,644.2 852.3,645.03 PORT_3.15@849.59,647.74
P_GIO_5_0: PORT_5.0 RA_33.3 | length 13.7
  Top Layer w0.2: RA_33.3@875.6,636 875.6,638.8 879.9,643.1 881.79,643.1 PORT_5.0@883.89,645.2
P_GIO_5_1: PORT_5.1 RA_33.2 | length 11.9
  Top Layer w0.2: RA_33.2@874.8,636 874.8,638.65 PORT_5.1@881.35,645.2
P_GIO_5_2: PORT_5.2 RA_33.1 | length 11.2
  Top Layer w0.2: RA_33.1@874,636 874,639 878.81,643.81 PORT_5.2@878.81,645.2
P_GIO_5_3: PORT_5.3 RA_33.0 | length 10.5
  Top Layer w0.2: RA_33.0@873.2,636 873.2,639.1 876.27,642.17 PORT_5.3@876.27,645.2
P_GIO_5_9: PORT_5.8 RA_35.4 | length 13.6
  Top Layer w0.2: PORT_5.8@866.11,647.74 864.5,646.13 864.5,637.9 RA_35.4@866.7,635.7
P_GIO_5_10: PORT_5.9 RA_35.5 | length 12.5
  Top Layer w0.2: RA_35.5@867.5,635.7 867.5,646.59 PORT_5.9@868.65,647.74
P_GIO_5_11: PORT_5.10 RA_35.6 | length 13.2
  Top Layer w0.2: RA_35.6@868.3,635.7 868.3,638.3 869.9,639.9 869.9,646.45 PORT_5.10@871.19,647.74
P_GIO_5_12: PORT_5.11 RA_35.7 | length 15
  Top Layer w0.2: RA_35.7@869.1,635.7 869.1,638.4 v1(871.3,640.6)
  Bottom Layer w0.2: v1(871.3,640.6) 875,644.3 875,646.47 PORT_5.11@873.73,647.74
P_GIO_5_13_E_VCC: 34.5 PORT_5.13 | length 12.1
  Top Layer w0.2: v1(880.3,639.5) 880.5,639.3 34.5@880.5,636.3
  Bottom Layer w0.2: PORT_5.13@878.81,647.74 880.1,646.45 880.1,639.7 v1(880.3,639.5)
P_GIO_5_14_E_SYNC: 34.6 PORT_5.14 | length 12.5
  Top Layer w0.2: 34.6@881.3,636.3 v1(881.3,638.5)
  Bottom Layer w0.2: v1(881.3,638.5) 881.3,642.4 882.6,643.7 882.6,646.49 PORT_5.14@881.35,647.74
P_GIO_5_15_AO4: 34.7 PORT_5.15 | length 13.3
  Top Layer w0.2: 34.7@882.1,636.3 882.1,639.5 v1(882.2,639.6)
  Bottom Layer w0.2: v1(882.2,639.6) 882.2,641.2 885.3,644.3 885.3,646.1 883.89,647.51 PORT_5.15@883.89,647.74
SOUND: Connector.120 R6.1 | length 39.1
  Top Layer w0.2: v1(648.8,603.6) 648.8,602.9 v1(653.7,598) ; v1(656.5,598.1) 656.445,598.1 655.6,597.255 655.6,578.2 R6.1@658.1,575.7 R6.1@658.1,575.6
  Bottom Layer w0.2: Connector.120@645.795,607.06 645.795,606.605 v1(648.8,603.6) ; v1(653.7,598) 653.8,598.1 v1(656.5,598.1)
V_VAR: ELVIS_PORT_DIO_2.13 Rvar3.1 | length 153
  Bottom Layer w0.2: ELVIS_PORT_DIO_2.13@763.27,701.04 765.71,698.6 775.8,698.6 777.3,697.1 777.3,695.4 781.4,691.3 786,691.3 789.5,687.8 798.1,687.8 820,709.7 843.3,709.7 880.9,672.1 Rvar3.1@880.9,667.9
VCC1: "TPS 1.3" C19.2 Connector.2 Connector.66 R13.1 | length 121.6
  Top Layer w0.7: v1(623.9,603.9) 624.17,604.17 624.17,606.14 ; 624.19,606.12 624.17,606.14 ; Connector.66@625.475,609.6 624.185,608.31 624.17,608.31 624.17,606.14 ; R13.1@628.71,541.36 R13.1@628.71,540.96 C19.2@630.71,540.96
  Bottom Layer w0.7: Connector.66@625.475,609.6 625.4,609.6 624.1,608.3 620.5,608.3 618.5,610.3 618.5,706 620.7,708.2 623.4,708.2 625.475,706.125 Connector.2@625.475,706.12
VCC1.8: C6.1 Connector.3 Connector.67 V1.1 V1.3 | length 103.9
  Top Layer w0.7: C6.1@657.4,552.33 C6.1@657.7,552.03
  Bottom Layer w0.7: Connector.67@628.015,609.6 628.015,611.185 620.9,618.3 620.9,694.4 629.3,702.8 629.3,704.835 Connector.3@628.015,706.12
VCC2.5: C8.1 Connector.62 Connector.126 Vcc2.1 Vcc2.3 | length 103.3
  Bottom Layer w0.7: Connector.126@628.015,607.06 628.015,607.685 626.7,609 626.7,610.5 619.8,617.4 619.8,695.365 Connector.62@628.015,703.58
VCC3.3: C7.1 C9.1 C17.1 Connector.41 Connector.52 Connector.60 Connector.63 Connector.84 Connector.101 Connector.127 ELVIS_PORT_DIO_1.4 ELVIS_PORT_DIO_2.4 ELVIS_PORT_DIO_3.4 P0RT_3.4 PORT_1.4 PORT_2.4 PORT_3.4 PORT_5.4 R3.1 R4.1 R5.1 R9.1 R10.1 R11.1 R12.1 R50.2 RA16.4 RA16.5 RA16.6 RA16.7 RA19.4 RA19.5 RA19.6 RA19.7 V1.2 V3.3.1 Vcc2.2 | length 13.7
  Top Layer w0.7: C9.1@642.62,548.9 642.66,548.94 Vcc2.2@644.16,548.94 ; v1(680,528) R12.1@683,528 v1(683,526)
  Bottom Layer w0.7: v1(626,572) R11.1@629,572 ; v1(627,579) R10.1@629,579 ; v1(627,596) R9.1@629,596 ; v1@649.4,652 v1(649.4,652.1)
  other v1: 627.89,601.54 627.94,602.84 628,604.09 627.1,605.3 629.85,615.55 633.87,615.57 624.6,628.3 625.9,629.7 624.6,630.7 626.6,631.9 624.6,632 631.6,635.8 634.6,638.3 631.8,638.4 633.3,639.7 635.8,639.8 660,641.6 662.1,643.7 657.6,643.8 660,644 660,646.2 648.4,652.9 650.3,653.6 651.9,654.3 650.9,655.3 674.4,657.9 675.3,660.5 677.6,660.7 732,663 734,663 747,663 749,663 751,663 753,663 755,663 732,667 734,667 747,667 749,667 751,667 753,667 755,667 747,683 748,684 749,685 750,686 751,687 752,688 753,689 754,690 735,695 736,696 735,697 734,705 735,706 736,707
VCC5: 2.22 2.23 2.31 2.32 "TPS 1.0" "TPS 1.1" C2.2 C3.2 C4.2 C5.2 C16.1 C18.1 Connector.1 Connector.42 Connector.51 Connector.59 Connector.65 Connector.83 Connector.102 ELVIS_PORT_DIO_1.5 ELVIS_PORT_DIO_2.5 ELVIS_PORT_DIO_3.5 P0RT_3.5 PORT_1.5 PORT_2.5 PORT_3.5 PORT_5.5 R7.2 R8.2 R14.2 R15.2 Rvar2.0 Rvar3.0 SREG1.9 SREG1.14 SREG2.9 SREG2.14 SREG3.9 SREG3.14 SREG4.9 SREG4.14 SREGLCD1.9 SREGLCD1.14 V3.3.2 VCC_Switch.1 WG1.1 | length 161.7
  Top Layer w0.2: 631.43,537.2 632.7,537.2
  Top Layer w0.7: C4.2@665.3,565.2 666.7,565.2 v1(668.2,566.7) SREG1.14@668.2,568.3 SREG1.14@668.2,568.5 ; SREG1.9@674.55,568.5 SREG1.9@674.55,568.3 674.55,566.55 675.1,566 v1(675.1,565.8) ; C2.2@679.5,565.9 681.3,565.9 v1(682,566.6) SREG2.14@682,568.3 SREG2.14@682,568.5 ; v1(688.2,565.7) 688.2,566 688.35,566.15 SREG2.9@688.35,568.3 SREG2.9@688.35,568.5 ; C3.2@694.7,559.2 694.7,565.6 v1(694.8,565.7) ; SREG3.14@696,568.7 696,566.7 v1(696.1,566.6) ; SREG3.9@702.35,568.9 SREG3.9@702.35,568.7 702.35,566.85 v1(702.6,566.6) ; SREG4.14@708.8,568.6 SREG4.14@708.8,568.4 708.8,567.2 v1(709,567) ; SREG4.9@715.15,568.6 715.2,568.55 v1(715.2,566.7) ; SREG4.9@715.15,569.1 715.2,569.15 C5.2@715.2,571.6
  Bottom Layer w0.7: v1(619.6,574.5) 644.4,574.5 652.2,566.7 v1(668.2,566.7) 668.5,566.4 672.7,566.4 ; v1(675.1,565.8) 675.1,566 674.7,566.4 672.7,566.4 ; v1(717.6,564.4) 717.5,564.4 v1(715.2,566.7) 709.3,566.7 v1(709,567) 708.6,566.6 v1(702.6,566.6) v1(696.1,566.6) 695.7,566.6 v1(694.8,565.7) v1(688.2,565.7) 688.1,565.7 687.2,566.6 v1(682,566.6) 679.5,566.6 677.5,564.6 677.5,557.5 676.7,556.7 671.4,556.7 669.8,558.3 669.8,563.5 672.7,566.4 ; v1(738.6,689.3) v1@738.7,689.3 ; v1@764.8,662.1 v1(764.8,662.2)
  other v1: 682,511 681,513 679,514 677,516 675,518 673,520 690,521 671,522 688,523 669,524 667,526 686,526 665.462,527.462 663.462,529.462 680,531 678,533 682,533 676,535 680,535 674,537 678,537 672,539 676,539 674,541 678.2,593 681.1,593 653.5,629.5 654.9,630.9 653.2,631.2 647.1,636.1 647.1,638.3 644.6,638.8 644,641.4 641.9,641.7 764.8,659.3 766.6,659.3 729,660 765.8,660.8 728,661 730,661 727,662 835,669 837,669 839,669 801,670 803,670 765.7,670.8 840.8,670.9 729,671 731,671 835,671 839,671 842,672.1 836,674 838,674 729,675 731,675 801,676 803,676 836,676 838,676 764.9,676.3 743.8,690.6 739,691 740.6,691.1 742.4,691.1
VCC5_IN: DS.1 VCC_Switch.2
pads on no net: 3.5 3.16 3.17 3.18 3.19 3.21 3.26 3.34 3.35 3.46 3.47 3.48 3.52 3.62 3.64 3.69 3.70 3.71 3.82 3.83 3.92 3.97 3.98 3.99 3.100 3.101 3.118 3.119 34.3 34.4 Connector.4 Connector.61 Connector.64 Connector.128 CT2.0 DIP_PORT.4 DIP_PORT.5 DIP_PORT.6 DIP_PORT.7 DIP_PORT.12 DIP_PORT.13 DIP_PORT.14 DIP_PORT.15 DS.3 RA17.0 RA17.7 RA_22.0 RA_22.7 RA_25.0 RA_25.7 RA_28.3 RA_28.4 RA_31.0 RA_31.7 Rvar1.3 Rvar1.4 Rvar2.3 Rvar2.4 Rvar3.3 Rvar3.4 WG1.hole WG1.hole1 WG1.hole2 WG1.hole4
copper on no net: | length 0.2
  Bottom Layer w0.2: -24.5,1590.35 -24.5,1590.425 -24.5,1590.35

## Polygon pours and split planes (outlines as drawn)
VCC5 on Top Layer "VCC3.3_Polygon" (solid, pour order 94): 731.3,643 728.5,643 728.5,649.7 727.2,651 726.7,651.5 726.7,662.1 727.2,662.6 727.3,662.5 730.8,662.5 730.8,650.7 731.3,650.2
VCC3.3 on Top Layer "VCC33Polygon" (solid, pour order 148): 770.3,643.5 770.3,667.8 768.9,667.8 768.6,667.5 767.3,666.2 767.3,643.4
VCC3.3 on Top Layer "VCC33Polygon" (solid, pour order 146): 692.8,605.5 696.2,605.5 696.3,605.6 696.3,609.1 696.3,610 694.8,611.5 693.9,612.4 691.7,612.4 684.6,612.4 680.5,616.5 680.4,616.6 677.9,616.6 677.9,616.7 675.6,619 656.5,638.1 651.1,638.1 651.7,638.1 676.3,613.5 676.3,610.9 692,610.9 692.8,610.1
VCC3.3 on Top Layer "VCC5_Polygon" (solid, pour order 137): 672.5,608 676.3,608 676.3,613.5 651.4,638.4 650.5,637.5 650.5,637.3 650.5,636.2 672.5,614.2
VCC3.3 on Top Layer "VCC3.3_Polygon" (solid, pour order 122): 837.7,642.1 837.8,642 841.2,642 841.2,667.6 841,667.8 837.7,667.8
VCC3.3 on Top Layer "VCC5_Polygon" (solid, pour order 114): 627.59,614.49 680.87,667.77 844.28,667.77 845.48,666.57 845.48,663.58 844.73,662.83 682.27,662.83 634.02,614.58
VCC5 on Top Layer "VCC5Polygon" (solid, pour order 143): 657.1,705 660.2,705 660.2,660.3 660.2,659.7 665.9,654 660.1,648.2 659.1,648.2 658.6,648.2 654.7,652.1 657.1,654.5 657.1,702.1
VCC5 on Top Layer "VCC5_Polygon" (solid, pour order 138): 637.2,705 639.9,705 639.9,640.9 637.2,638.2 637.2,635.6
VCC5 on Top Layer "VCC5_Polygon" (solid, pour order 113): 616.04,610.544 616.04,617.19 675.7,676.85 846.53,676.85 846.32,676.64 846.32,672.21 843.08,668.97 680.84,668.97 622.71,610.84 622.71,610.71
VCC5 on Top Layer "VCC3.3_Polygon" (solid, pour order 111): 738.3,691.8 744.5,691.8 744.5,669 734.5,669 736.5,671 736.5,690.6
VCC3.3 on Top Layer "VCC3.3_Polygon" (solid, pour order 105): 734,707 734,695 737,695 737,707
VCC5 on Top Layer "VCC5_Polygon" (solid, pour order 136): 716.6,564 720.9,559.7 725,563.8 725,566.3 717.5,566.3 715.9,564.7
VCC5 on Top Layer "VCC5_Polygon" (solid, pour order 131): 777.9,544.5 782.3,544.5 782.8,544 782.8,537.3 726.4,537.3 725.3,536.2 725.1,536.4 725.1,539.5 725.1,539.8 729.1,543.8 732.6,540.3 732.9,540.3 732.9,539.9 733,539.8 733.2,539.6 776.1,539.6 776.1,540 777.8,541.7
VCC5 on Top Layer "VCC5_Polygon" (solid, pour order 129): 670.1,539.5 692.1,517.5 692.5,517.5 696.4,521.4 696.2,521.6 696.2,530.3 705.2,530.3 711.1,536.2 721.8,536.2 725.3,536.2 742.9,553.8 744.9,555.8 744.9,592.2 744.9,592.5 742.3,595.1 741.3,594.1 665.2,594.1 665.2,587 666,586.2 666.1,586.1 704.8,586.1 705.1,586.1 708.2,589.2 708.3,589.3 720.8,589.3 721.1,589.3 724.1,586.3 724.1,564.4 724.1,564.1 715.7,555.7 715.4,555.4 686.3,555.4
VCC5 on Top Layer "VCC33Polygon" (solid, pour order 149): 767.1,643.5 764.4,643.5 764.5,643.6 764.5,662.5 767.1,662.5
VCC5 on Top Layer "VCC5Polygon" (solid, pour order 132): 752.5,616.1 752.8,616.1 753.2,616.5 757.5,616.5 757.6,616.5 757.8,616.7 757.8,621.4 759.3,621.4 759.1,621.2 759.1,620.8 759.1,615.6 759,615.5 758.5,615 757,615 752.6,615 752.5,614.9
VCC5 on Top Layer "VCC5Polygon" (solid, pour order 130): 776.6,611.8 776.6,616.9 774,619.5 770,619.5 770,621.3 768,623.3 766.3,625 762.8,625 758.4,625 759.3,624.1 760.8,624.1 764.8,624.1 765.7,623.2 768.6,620.3 768.6,618.7 768.6,618.6 773.4,613.8 773.5,613.7 773.5,611.8
VCC5 on Top Layer "VCC5Polygon" (solid, pour order 128): 754,622.8 754,621.4 758.4,621.4 759.3,621.4 760.3,622.4 760.9,623 760.9,623.6 760.9,642.6 759,644.5 759.1,644.6 759.1,648.3 759.1,648.6 760.6,650.1 766.6,656.1 766.6,657.6 764.5,657.6 763.8,656.9 756.8,649.9 756.8,642.9 756.8,642.8 759,640.6 758.2,639.8 758.2,623.9 758.2,623.4 757.6,622.8
VCC1 on Top Layer "VCC5_Polygon" (solid, pour order 90): 633.79,535.44 633.79,524.16 627.59,524.16 622.92,528.83 622.92,605.32 623.87,606.27 624.57,606.27 624.86,605.98 624.86,548.05 627.98,544.93 630.36,544.93 631.66,543.63 631.66,536.55 633.19,535.02
VCC5 on Top Layer "VCC5_Polygon" (solid, pour order 79): 642.45,521.31 642.44,521.32 642.44,539.59 642.21,539.82 632.78,539.82 632.26,539.3 632.26,536.78 632.89,536.15 633.52,536.15 634.49,535.18 634.49,521.28 634.66,521.11
VCC5 on Top Layer "VCC5Poly" (solid, pour order 84): 679.7,704.4 679.7,702.1 680,701.8 680.1,701.7 683,701.7 683,709 682.2,709.8 680.4,711.6 642.8,711.6 642.4,711.6 639.5,708.7 639.6,708.8 678.1,708.8 678.6,708.8 679.6,707.8
VCC5 on Top Layer "VCC5Poly" (solid, pour order 81): 624.6,705.5 623.7,704.6 623.1,704 619.9,704 619.9,705.8 621.9,707.8 624.7,707.8
VCC5 on Top Layer "VCCE5Poly" (solid, pour order 77): 665.2,594.1 664.3,595 661.1,595 661.1,585.5 662.3,585.5 662.6,585.8 662.9,586.1 666.1,586.1
VCC5 on Top Layer "VCCE5Poly" (solid, pour order 100): 652.5,718.2 652.4,718.1 652.4,715.3 649.6,715.3 648.4,714.1 641.8,707.5 623.1,707.5 622.3,707.5 620.8,706 620.6,705.8 620.6,611.1 617,611.1 616.1,612 616,612.1 616,706.9 619.9,710.8 620.5,711.4 629.1,711.4 629.8,711.4 635.2,716.8 636.6,718.2 652.5,718.2
E_+5 on Top Layer "VCCElvis5Poly" (solid, pour order 93): 712.5,716.8 712.2,717.1 708.9,717.1 708.1,717.1 705.3,719.9 699.9,725.3 646.6,725.3 646.6,719.4 646.8,719.2 647.5,718.5 651.5,718.5 691.8,718.5 700.8,709.5 703,707.3 717,707.3
VCC3.3 on Top Layer "VCC3.3Poly" (solid, pour order 86): 844.28,667.77 857.03,667.77 875.3,649.5 875.6,649.2 875.6,643.4 873,643.4 872.5,643.9 872,644.4 872,648.7 872,648.9 858.3,662.6 858.027,662.873 844.773,662.873
VCC3.3 on Top Layer "VCC33Polygon" (solid, pour order 145): 656.8,705 656.8,658.5 649.6,651.3 648.015,652.885 647.985,652.885 650.9,655.8 654.2,659.1 654.2,705
VCC5 on Top Layer "VCC3.3Polygon" (solid, pour order 141): 672.3,608 672.3,614.1 672.1,614.1 663.5,622.7 653.2,633 652.9,633 651.3,631.4 669.5,613.2 669.5,608.7 669.5,608
VCC3.3 on Top Layer "VCC3.3Polygon" (solid, pour order 139): 636.9,705 632,705 631.3,704.3 631.3,633.1 631.5,633.1 636.7,638.3
VCC5 on Top Layer "VCC5_Polygon" (solid, pour order 135): 706.5,594.1 706.5,596.7 698.7,596.7 698.7,594.1
VCC5 on Top Layer "VCC5_Polygon" (solid, pour order 133): 683.5,594.1 683.5,596.8 683.4,596.7 676,596.7 676,594.1
VCC5 on Top Layer "VCC5_Polygon" (solid, pour order 126): 661.38,530.4 665,530.4 684.8,510.6 684.8,510.4 659.663,510.4 659.422,510.642 661.41,512.63 661.41,530.37 661.38,530.4
VCC5 on Top Layer "VCC3.3_Polygon" (solid, pour order 95): 785.5,669 785.5,677.5 785.1,677.5 777.6,685 777.3,685.3 777.3,688.3 776.1,689.5 775.9,689.7 768.3,689.7 764.5,689.7 764,690.2 764,692.8 764,692.9 764.5,693.4 764.6,693.5 765.8,693.5 765.8,693.8 766,694 768.5,694 768.5,692 768.7,691.8 768.8,691.7 783.3,691.7 784,691.7 788.9,686.8 798.9,676.8 798.9,669
VCC5 on Top Layer "VCC5_Polygon" (solid, pour order 76): 642.45,510.64 642.45,521.31 629.82,521.31 628.89,522.24 622.62,528.51 622.62,548.39 622.62,605.14 622.71,605.23 621.37,606.57 621.37,607.5 621.37,607.54 622.08,608.25 622.79,608.25 623.02,608.48 623.02,610.78 622.98,610.74 616.21,610.74 616.04,610.57 616.04,516.68 621.86,510.86
VCC5 on Top Layer "VCC5_Polygon" (solid, pour order 98): 642.308,510.642 659.422,510.642 661.41,512.549 661.41,529.571 661.38,529.6 656.8,529.6 656.11,528.938 656.11,526.021 657.63,524.563 657.63,523.171 651.857,517.632 642.45,517.632
VCC3.3 on Top Layer "VCC3.3_Polygon" (solid, pour order 102): 651.33,523.2 651.39,523.26 654.89,523.26 655.64,524.01 655.64,526.22 655.86,526.44 655.86,529.91 656.94,530.99 664.61,530.99 665.29,531.67 665.29,544.6 661.54,548.35 640.87,548.35 628.51,560.71 628.51,604.77 626.96,606.32 626.96,608.47 626.69,608.2 625.28,608.2 625.06,607.98 625.06,548.44 628.18,545.32 630.76,545.32 633.78,542.3 640.87,542.3 644.25,538.92 644.25,530.15 648.16,526.24 649.5,526.24 651.34,524.4 651.34,523.23
VCC3.3 on Top Layer "VCC5_Polygon" (solid, pour order 106): 843.26,528.887 843.3,528.927 856.456,528.927 858.3,527.091 858.3,511.358 858.041,511.1 684.862,511.1 664.56,531.319 664.56,544.58 693.333,515.924 801.73,515.924 814.756,528.897
VCC2.5 on Top Layer "VCC5_Polygon" (solid, pour order 107): 639.97,550.21 644.34,550.21 645.69,548.86 652.46,548.86 654.11,550.51 654.11,555.17 651.64,557.64 638.93,557.64 630.37,566.2 630.37,606.69 628.58,608.48 627.52,608.48 627.31,608.27 627.31,606.38 628.75,604.94 628.75,561.1
VCC3.3 on Top Layer "VCC3.3_Polygon" (solid, pour order 110): 656.39,547.83 656.39,550.74 656.65,551 660.46,551 661.21,550.25 661.21,547.83
VCC1.8 on Top Layer "VCC3.3_Polygon" (solid, pour order 112): 654.72,551.48 654.76,551.44 660.54,551.44 661.54,550.44 661.54,549.01 661.74,548.81 668.13,548.81 668.65,549.33 668.65,554.07 666.29,556.43 663.36,556.43 658.87,560.92 639.57,560.92 633.77,566.72 633.76,566.72 632.78,567.7 632.78,605.78 631.82,606.74 631.82,607.63 631.85,607.66 631.85,609.91 630.15,611.61 626.95,611.61 626.84,611.5 626.84,608.98 627.09,608.73 628.83,608.73 630.54,607.02 630.54,566.57 639.16,557.95 652.13,557.95 654.62,555.46
VCC5 on Top Layer "VCC5_Polygon" (solid, pour order 117): 771.9,704.7 769.6,704.7 769.6,700 766,696.4 766,696.1 766,694 768.5,694 768.5,696.6 771.9,700 771.9,700.1
VCC3.3 on Top Layer "VCC3.3_Polygon" (solid, pour order 118): 769.5,704.6 766.6,704.6 766.4,704.4 766.4,700 765.5,700 762.3,696.8 762.3,695.7 763.9,694.1 764,694 765.7,694 765.7,696.3 765.6,696.4 769.3,700.1 769.4,700.1
VCC3.3 on Top Layer "VCC3.3_Polygon" (solid, pour order 120): 762.3,696.8 760.1,696.8 760,696.7 760,696.1 759.8,696.1 759.2,695.5 758.9,695.2 758.3,695.2 751,695.2 750.1,694.3 750.1,692.4 749.7,692.4 744.9,687.6 745.1,687.4 745.1,684.4 745.1,683.9 746.7,682.3 746.8,682.2 748.5,682.2 748.5,682.6 759,693.1 759.1,693 761.5,693 762,693 762.6,693.6 763,694 764.109,694
VCC3.3 on Top Layer "VCC3.3_Polygon" (solid, pour order 78): 731.5,643 734.7,643 734.7,667.8 731,667.8 731,650.9 731.5,650.4
VCC3.3 on Top Layer "VCC3.3_Polygon" (solid, pour order 101): 806.3,643.9 806.3,667.8 803.6,667.8 803.5,667.9 803.1,667.5 803.1,643.9
E_+5 on Top Layer "VCC33Polygon" (solid, pour order 116): 718.5,724.9 718.5,713 722,713 722,725.1 718.6,725.1 718.5,725.2
E_+5 on Top Layer "VCC33Polygon" (solid, pour order 119): 718.5,719.606 715.694,716.8 712.5,716.8 712.5,707.8 712.6,707.7 713,707.3 717,707.3 717,709 719.4,711.4 719.5,711.5 721,711.5 721,712 722,713 722,719.606
VCC3.3 on Top Layer "VCC5Polygon" (solid, pour order 124): 624.2,705 627,705 627.4,704.6 627.4,629.6 627.4,629.4 624.5,626.5 624.3,626.7 624.3,662.9
VCC5 on Bottom Layer "VCC33Polygon" (solid, pour order 150): 764.5,662.6 764.5,658.9 767.1,658.9 767.1,676.9 764.5,676.9
VCC5 on Bottom Layer "VCC33Polygon" (solid, pour order 147): 677.1,586.1 677.3,586.3 677.3,605.3 687.4,605.3 690.3,608.2 692.5,608.2 692.7,608 692.7,604.9 692.7,604.5 685.9,597.7 684.9,596.7 682.4,596.7 682.4,586.1
VCC3.3 on Bottom Layer "VCC5Polygon" (solid, pour order 144): 662.9,643.5 662.9,643.8 650.9,655.8 647.8,652.7 648.2,652.7 659.1,641.8 660.2,640.7
VCC5 on Bottom Layer "VCC5Polygon" (solid, pour order 142): 655.4,630.8 642.6,643.6 642.5,643.6 642.4,643.6 641.3,642.5 641.3,641.7 641.3,641.4 652.1,630.6 653.6,629.1 653.7,629.1
VCC3.3 on Bottom Layer "VCC3.3Polygon" (solid, pour order 140): 631.3,636 631.3,633.1 642,622.4 647.8,628.2 647.8,628.4 646.7,628.4 636.8,638.3 636.7,638.4 636.7,640.8 632.6,640.8 631.3,639.5
GND on Bottom Layer "GND_Poly" (solid, pour order 134): 893.9,719.1 887.9,725.1 801.9,725.1 801.9,717.1 793.9,717.1 793.9,725.1 732.9,725.1 732.9,718.28 732.72,718.1 728.9,718.1 728.9,725.1 715.9,725.1 715.9,718.1 708.9,718.1 708.9,725.1 634.9,725.1 634.9,717.1 627.9,717.1 627.9,725.1 621.9,725.1 615.9,719.1 615.9,517.1 621.9,511.1 641.9,511.1 641.9,525.1 642.9,526.1 643.9,527.1 648.9,527.1 649.9,527.1 651.9,525.1 651.9,511.1 700.9,511.1 706.9,517.1 706.9,533.1 709.9,536.1 796.9,536.1 800.9,532.1 800.9,511.1 856.9,511.1 857.9,512.1 857.9,526.1 857.9,527.1 858.9,528.1 865.9,528.1 866.9,527.1 867.9,526.1 867.9,511.1 887.9,511.1 893.9,517.1 893.9,697.1 880.9,697.1 880.9,705.1 893.9,705.1
VCC5 on Bottom Layer "VCC3.3_Polygon" (solid, pour order 91): 731.375,684.65 728.75,684.65 728.525,684.425 728.525,668.975 731.375,668.975 731.4,669
VCC5 on Bottom Layer "VCC3.3_Polygon" (solid, pour order 85): 731.4,669.117 731.4,669.116 731.4,658.9 728.3,658.9 726.7,660.5 726.7,661.5 726.3,661.5 726.1,661.7 726.2,661.8 726.2,668.9 726.2,669.1 728.5,671.4
VCC5 on Bottom Layer "VCC3.3_Polygon" (solid, pour order 109): 736.8,706 739.5,706 739.5,700 740.5,699 741.5,699 741.5,698 744.5,695 744.5,690.5 744.4,690.5 743.7,689.8 743.5,689.6 740.4,689.6 739.6,689.6 738.4,688.4 738.3,688.5 738.3,697 738.2,697 736.6,698.6 736.8,698.8 736.8,706
VCC3.3 on Bottom Layer "VCC3.3_Polygon" (solid, pour order 108): 731.7,680.9 734.3,680.9 734.3,687.7 734.3,692.3 737,695 737,697 734,697 734,695 731.7,692.7
VCC3.3 on Bottom Layer "VCC3.3Poly" (solid, pour order 88): 673.9,688.2 673.9,697.3 673.9,697.7 677.1,700.9 677.7,701.5 680.1,701.5 680.1,702.5 682.3,704.7 682.4,704.6 684.5,704.6 684.5,702.8 684.6,702.7 678.4,696.5 678.4,681.7 678.4,659.8 675.9,657.3 675,656.4 673.5,656.4
VCC5_IN on Bottom Layer "VCCEln5Poly" (solid, pour order 97): 652,716.3 652,713 649.3,710.3 619.5,710.3 619.5,715.1 619.8,715.4 626.7,715.4 646.4,715.4 647.3,716.3
VCC5 on Bottom Layer "VCC5Poly" (solid, pour order 89): 879.9,669.5 879.9,666 879.7,665.8 847.4,665.8 847.4,667.5 845.2,669.7
VCC5 on Bottom Layer "VCC5Poly" (solid, pour order 80): 869.7,643.2 872.5,643.2 872.7,643.4 872.7,647.9 872.7,649.1 871.1,650.7 869.8,652 864,652 842,674 839.9,671.9 839.9,670.1 840.2,670.1 860.7,649.6 861.3,649 869.3,649
VCC5 on Bottom Layer "VCC5_Polygon" (solid, pour order 127): 661,530.4 661.1,530.4 681.1,510.4 684.8,510.4 685.4,510.4 696.4,521.4 680.4,537.4 680.2,537.4 679.5,537.4 673.7,543.2
VCC5 on Bottom Layer "VCC3.3_Polygon" (solid, pour order 123): 835,642.5 838.7,642.5 838.8,642.6 839,642.8 839,676.9 835,676.9
VCC3.3 on Bottom Layer "VCC3.3_Polygon" (solid, pour order 99): 736,702 734,702 734,707 737,707 737,702
VCC3.3 on Bottom Layer "VCC3.3_Polygon" (solid, pour order 83): 731.73,684.64 734.07,684.64 734.16,684.55 734.3,684.41 734.3,681.48 734.3,662.95 734.17,662.82 734.15,662.84 731.81,662.84
VCC3.3 on Bottom Layer "VCC3.3_Polygon" (solid, pour order 115): 626.84,604.91 626.84,604.41 627.37,603.88 627.37,601.25 627.79,600.83 628.45,600.83 631.82,604.2 631.82,612.39 635.87,616.44 629.52,616.44 628.81,615.73 628.81,610.76 629.24,610.33 629.24,606.42 628.45,605.63 627.42,605.63
VCC3.3 on Bottom Layer "VCC3.3_Polygon" (solid, pour order 121): 745.9,683.2 746,683.2 752.8,690 753.1,690.3 754.1,690.3 754.3,690.3 755.2,689.4 756.9,687.7 756.9,662.8 747.3,662.8 747.2,662.9 746.8,663.3 746.8,682.2
VCC5 on Bottom Layer "VCC3.3_Polygon" (solid, pour order 104): 800.5,644 803.7,644 804,644.3 804,676.8 800.5,676.8
VCC3.3 on Bottom Layer "VCC5Polygon" (solid, pour order 125): 628.8,614.5 633.93,614.5 635.685,616.255 635.609,616.332 635.609,616.44 635.56,616.44 627.5,624.5 627.4,624.6 627.4,632.5 624.5,632.5 624.3,632.3 624.3,626.7 624.3,619 628.8,614.5
VCC5 on Bottom Layer "VCC5" (solid, pour order 82): 763.5,659.2 763.9,658.8 764,658.8 768,658.8 768.1,658.9 768,659 768,679 763.6,679 763.5,678.9 763.4,678.8 763.4,675.3
VCC5 on Bottom Layer "VCC5Poly" (solid, pour order 87): 654,627.8 657.3,631.1 645.1,643.3 640.9,643.3 640.8,643.3 639.2,641.7 653.3,627.6 653.7,627.6
VCC3.3 on Bottom Layer "VCC33Poly" (solid, pour order 92): 623.7,627.1 627.512,627.1 627.616,627.205 637.2,636.788 637.2,641.1 631.3,641.1 631,640.8 623.7,633.5 623.7,631.5
VCC3.3 on Bottom Layer "VCC33Poly" (solid, pour order 96): 664.162,643.279 663.779,643.279 660.2,639.7 647,652.9 647,653.3 647,653.8 650.3,657.1
VCC5 on Bottom Layer "VCC5Poly" (solid, pour order 103): 692.85,608.725 693,608.574 693,600.6 687.222,600.6 682.901,596.279 682.7,596.078 682.7,593.7 677.5,593.7 677.4,593.8 676.9,594.3 676.9,598.4 682.5,604 684.3,605.8 689.4,605.8 689.4,608.2 689.8,608.6

## Silkscreen, mask and mechanical layers (free items; w line width, h text height)
Mechanical 1:
  circle w0.127: c631.315,719.937 r2.5
  circle w0.127: c884.515,702.037 r2.5
  circle w0.127: c863.015,522.097 r3.96
  circle w0.127: c647.115,522.097 r3.96
  lines w0.127: 615.365,719.737 621.715,726.087 ; 615.365,719.737 621.715,726.087 ; 615.365,719.737 615.365,516.537 621.715,510.187 ; 621.715,510.187 888.415,510.187 ; 621.715,510.187 888.415,510.187 ; 621.715,726.087 709.083,726.087 ; 621.715,726.087 709.083,726.087 ; 709.083,726.087 709.345,725.825 709.345,718.217 715.445,718.217 715.445,725.835 715.697,726.087 729.883,726.087 730.04,725.93 730.04,718.217 731.815,718.217 731.815,725.905 731.997,726.087 794.533,726.087 794.715,725.905 794.715,718.217 800.785,718.217 800.785,725.755 801.117,726.087 ; 801.117,726.087 888.415,726.087 ; 801.117,726.087 888.415,726.087 ; 888.415,510.187 894.765,516.537 894.765,719.737 ; 888.415,726.087 894.765,719.737 ; 888.415,726.087 894.765,719.737 ; 707.615,522.887 ccw(c713.965,522.887) 713.965,516.537 732.205,516.537 ccw(c732.205,522.887) 738.555,522.887 738.555,529.237 ccw(c732.205,529.237) 732.205,535.587 713.965,535.587 ccw(c713.965,529.237) 707.615,529.237 707.615,522.887 ; 743.635,522.887 ccw(c749.985,522.887) 749.985,516.537 760.145,516.537 ccw(c760.145,522.887) 766.495,522.887 766.495,529.237 ccw(c760.145,529.237) 760.145,535.587 749.985,535.587 ccw(c749.985,529.237) 743.635,529.237 743.635,522.887 ; 771.575,522.887 ccw(c777.925,522.887) 777.925,516.537 793.165,516.537 ccw(c793.165,522.887) 799.515,522.887 799.515,529.237 ccw(c793.165,529.237) 793.165,535.587 777.925,535.587 ccw(c777.925,529.237) 771.575,529.237 771.575,522.887
Mechanical 13:
  pour cut-out: 643.155,522.097 ccw(c647.115,522.097) 647.115,518.137 ccw(c647.115,522.097) 651.075,522.097 ccw(c647.115,522.097) 647.115,526.057 ccw(c647.115,522.097)